# EAGLE board Schema_IOExp_De_Windt_Kyell (EAGLE 9.6.2)
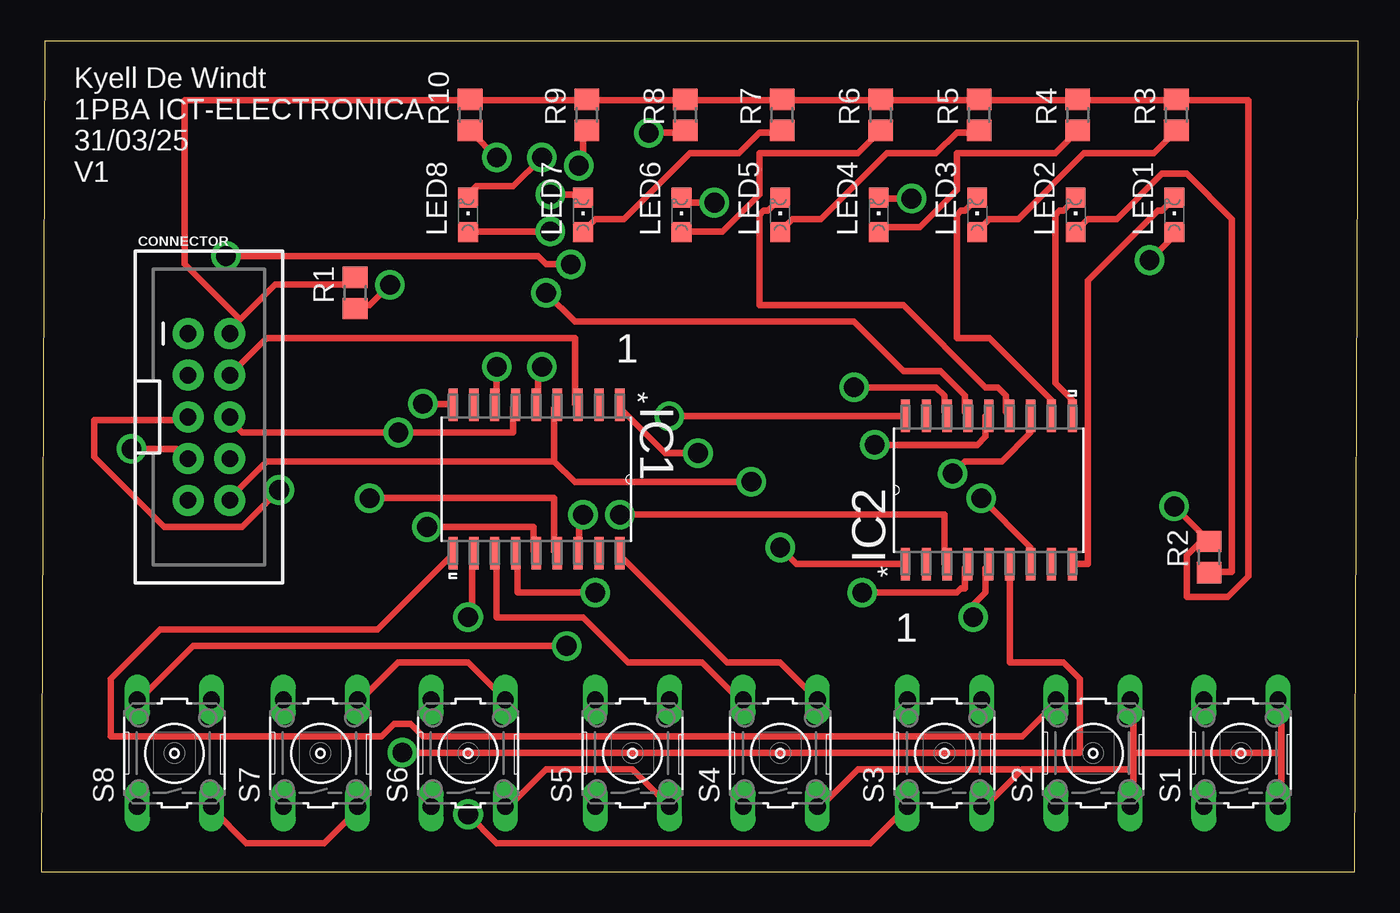
[diagram p0: board, top side]
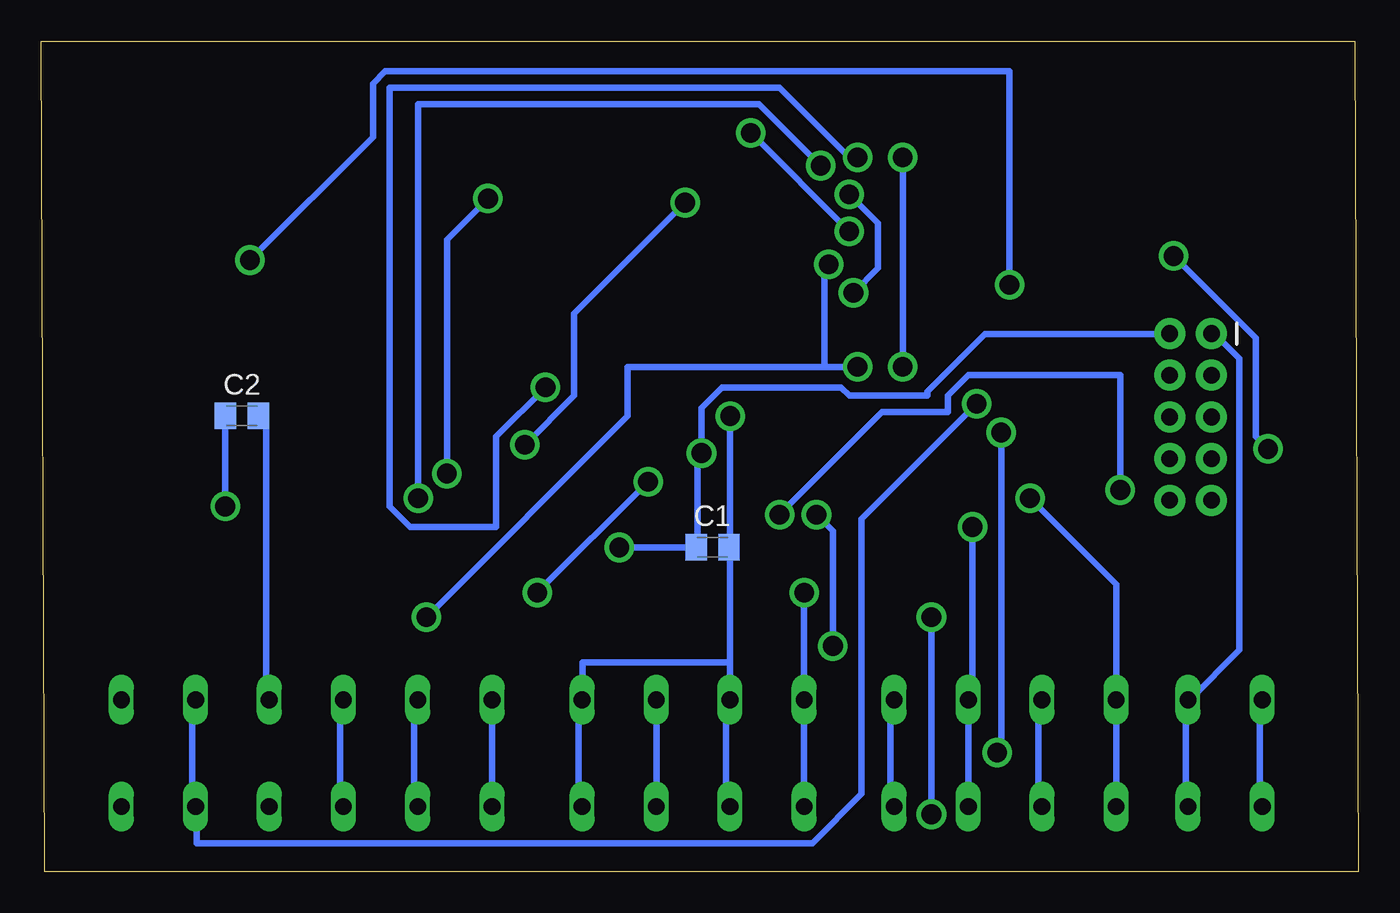
[diagram p1: board, bottom side, seen from below]

Size 80.21 x 50.59 mm. Coordinates in mm from the lower left corner, seen from the top.
Outline: 0,0 80,0 80.21,50.59 0.21,50.59 0,0
Copper layers (1*16): Top 0.035mm / dielectric 1.5mm / Bottom 0.035mm
Design rules "default *": minimum track width 0.4mm, minimum drill 1.2mm, track to track 16mil, track to pad 16mil, pad to pad 16mil, via to via 16mil, smd to smd 16mil, copper to edge 40mil, drill to drill 6mil, minimum pad ring 10mil, minimum via ring 8mil, stop-mask expansion 4mil, vias tented up to drill 0mil, thermal gap 10mil

## Footprints (pad centres in the part's own frame; a part is rotated, then mirrored left to right if it is on the bottom)
C0805K = smd 1.3 x 1.6: 1 -1,0; 2 1,0
2X5-SHROUDED = drill 1.016 pad 1.88: 1 -1.27,5.08; 2 1.27,5.08; 3 -1.27,2.54; 4 1.27,2.54; 5 -1.27,0; 6 1.27,0; 7 -1.27,-2.54; 8 1.27,-2.54; 9 -1.27,-5.08; 10 1.27,-5.08
SOIC127P1030X265-18N = smd 1.981 x 0.559: 1 -4.521,5.08; 2 -4.521,3.81; 3 -4.521,2.54; 4 -4.521,1.27; 5 -4.521,0; 6 -4.521,-1.27; 7 -4.521,-2.54; 8 -4.521,-3.81; 9 -4.521,-5.08; 10 4.521,-5.08; 11 4.521,-3.81; 12 4.521,-2.54; 13 4.521,-1.27; 14 4.521,0; 15 4.521,1.27; 16 4.521,2.54; 17 4.521,3.81; 18 4.521,5.08
CHIPLED_0805 = smd 1.2 x 1.2: A 0,-1.05; C 0,1.05
R0805 = smd 1.3 x 1.5: 1 -0.95,0; 2 0.95,0
B3F-10XX = drill 1.016 long: 1 -3.251,2.261; 2 3.251,2.261; 3 -3.251,-2.261; 4 3.251,-2.261

## Placement (x,y rotation side)
C1  100nF  [C0805K]  39.33,19.77 0 bottom
C2  100nF  [C0805K]  67.98,27.77 0 bottom
CONNECTOR  SV1  [2X5-SHROUDED]  10.22,27.7 0 top
IC1  MCP23S09-E/SO  [SOIC127P1030X265-18N]  30.16,23.91 270 top
IC2  MCP23S09-E/SO  [SOIC127P1030X265-18N]  57.71,23.25 90 top
LED1  groen  [CHIPLED_0805]  69,40 0 top
LED2  groen  [CHIPLED_0805]  63,40 0 top
LED3  groen  [CHIPLED_0805]  57,40 0 top
LED4  groen  [CHIPLED_0805]  51,40 0 top
LED5  geel  [CHIPLED_0805]  45,40 0 top
LED6  geel  [CHIPLED_0805]  39,40 0 top
LED7  rood  [CHIPLED_0805]  33,40 0 top
LED8  rood  [CHIPLED_0805]  26,40 0 top
R1  10K  [R0805]  19.12,35.25 90 top
R2  10K  [R0805]  71.12,19.17 90 top
R3  100  [R0805]  69.12,46.09 90 top
R4  100  [R0805]  63.12,46.09 90 top
R5  100  [R0805]  57.12,46.09 90 top
R6  100  [R0805]  51.12,46.09 90 top
R7  100  [R0805]  45.12,46.09 90 top
R8  100  [R0805]  39.23,46.09 90 top
R9  68  [R0805]  33.23,46.09 90 top
R10  68  [R0805]  26.12,46.09 90 top
S1  [B3F-10XX]  73.06,7.22 90 top
S2  [B3F-10XX]  64.06,7.22 90 top
S3  [B3F-10XX]  55.01,7.22 90 top
S4  [B3F-10XX]  45.01,7.22 90 top
S5  [B3F-10XX]  36.01,7.22 90 top
S6  [B3F-10XX]  26.01,7.22 90 top
S7  [B3F-10XX]  17.01,7.22 90 top
S8  [B3F-10XX]  8.12,7.22 90 top

## Library data of the parts
C1 C2 = Fidget_Spinner; SPICEPREFIX: C
CONNECTOR = SparkFun-Connectors; PROD_ID: CONN-08671; SF_ID: PRT-08506
IC1 IC2 = MCP23S09_E_SO; DESCRIPTION: IC I/O EXPANDER; MPN: McP23S09-E/SO; OC_FARNELL: 1699844; OC_NEWARK: 04R7657; PACKAGE: SOIC-18; SUPPLIER: Microchip
LED1-LED8 = led
R1-R10 = rcl; SPICEPREFIX: R
S1-S8 = switch-omron; MPN: B3F-1000; OC_FARNELL: 176432; OC_NEWARK: 36M3542

## Nets
CH1: CONNECTOR.4 IC1.3
CH2: CONNECTOR.5 IC2.3
DRUKKNOP1: IC1.9 S1.1 S1.2
DRUKKNOP2: IC1.10 S2.1 S2.2
DRUKKNOP3: IC1.11 S3.1 S3.2
DRUKKNOP4: IC1.12 S4.1 S4.2
DRUKKNOP5: IC1.13 S5.1 S5.2
DRUKKNOP6: IC1.14 S6.1 S6.2
DRUKKNOP7: IC1.15 S7.1 S7.2
DRUKKNOP8: IC1.16 S8.1 S8.2
GND: C1.2 C2.2 CONNECTOR.1 IC1.18 IC2.18 S1.3 S1.4 S2.3 S2.4 S3.3 S3.4 S4.3 S4.4 S5.3 S5.4 S6.3 S6.4 S7.3 S7.4 S8.3 S8.4
LED1: IC2.9 LED1.C
LED2: IC2.10 LED2.C
LED3: IC2.11 LED3.C
LED4: IC2.12 LED4.C
LED5: IC2.13 LED5.C
LED6: IC2.14 LED6.C
LED7: IC2.15 LED7.C
LED8: IC2.16 LED8.C
MISO: CONNECTOR.6 IC1.6 IC2.6
MOSI: CONNECTOR.7 IC1.5 IC2.5
N$3: LED8.A R8.1
N$4: LED7.A R7.1
N$5: LED6.A R6.1
N$6: LED5.A R5.1
N$7: LED4.A R4.1
N$8: LED3.A R3.1
N$9: LED2.A R2.1
N$10: LED1.A R1.1
N$12: IC2.7 R9.1
N$13: IC1.7 R10.1
SCK: CONNECTOR.10 IC1.4 IC2.4
VDD: C1.1 C2.1 CONNECTOR.2 IC1.1 IC2.1 R1.2 R2.2 R3.2 R4.2 R5.2 R6.2 R7.2 R8.2 R9.2 R10.2

## Tracks (layer width: path | path; a pad name or v marks a point on that pad's centre or on a via)
CH1
  Top 0.4: CONNECTOR.4 13.75,32.5 32.5,32.5 32.5,28.5 IC1.3
CH2  (via drill 1.2)
  Top 0.4: v35.25,21.75 55,21.75 55,18.75 IC2.3 | v14.5,23.25 12.25,21 7.5,21 3.25,25.25 3.25,27.5 8.75,27.5 CONNECTOR.5
  Bottom 0.4: v35.25,21.75 29,28 25,28 25,29 23.75,30.25 14.5,30.25 v14.5,23.25
DRUKKNOP1  (via drill 1.2)
  Top 0.4: v23.25,28.5 25,28.5 IC1.9
  Bottom 0.4: v23.25,28.5 30.25,21.5 30.25,4.75 33.25,1.75 70.75,1.75 70.75,3.75 S1.1 71,4 71,10.25 S1.2
DRUKKNOP2
  Top 0.4: IC1.10 25,19.25 20.5,14.75 7.25,14.75 4.25,11.75 4.25,8.25 20.75,8.25 21.5,9 22.5,9 23.25,8.25 59.75,8.25 61.75,10.25 S2.2
  Bottom 0.4: S2.1 62,4 62,10.25 S2.2
DRUKKNOP3  (via drill 1.2)
  Top 0.4: v26,15.5 26.25,15.5 26.25,19.25 IC1.11 | v26,3.5 27.75,1.75 50.5,1.75 52.5,3.75 S3.1
  Bottom 0.4: v26,3.5 v26,15.5 | S3.2 52.75,10.25 52.75,4 S3.1
DRUKKNOP4
  Top 0.4: IC1.12 27.75,19.25 27.75,15.5 33,15.5 35.75,12.75 40.25,12.75 42.5,10.5 S4.2
  Bottom 0.4: S4.1 42.75,4 42.75,10.25 S4.2
DRUKKNOP5  (via drill 1.2)
  Top 0.4: v33.75,17 29,17 29,19.25 IC1.13
  Bottom 0.4: v33.75,17 33.75,10.5 S5.2 33.75,10.25 33.75,4 S5.1
DRUKKNOP6  (via drill 1.2)
  Top 0.4: v23.5,21 30,21 30,19.5 IC1.14
  Bottom 0.4: v23.5,21 23.5,10.5 S6.2 23.75,10.25 23.75,4 S6.1
DRUKKNOP7  (via drill 1.2)
  Top 0.4: v20,22.75 31.25,22.75 31.25,19.5 IC1.15
  Bottom 0.4: v20,22.75 14.75,17.5 14.75,10.5 S7.2 14.75,10.25 14.75,4 S7.1
DRUKKNOP8  (via drill 1.2)
  Top 0.4: v33,21.75 32.75,21.75 32.75,19.5 IC1.16 | v32,13.75 9.25,13.75 6,10.5 S8.2
  Bottom 0.4: v33,21.75 32,20.75 v32,13.75 | S8.1 6,4 6,10.25 S8.2
GND  (via drill 1.2)
  Top 0.4: S7.3 19.25,3.75 17.25,1.75 12.5,1.75 10.5,3.75 S8.3 | S6.4 28.25,10.5 26,12.75 21.75,12.75 19.5,10.5 S7.4 | v38.25,27.75 52.5,27.75 IC2.18 | IC1.18 35.25,19.25 41.75,12.75 45,12.75 47.25,10.5 S4.4 | 75.5,7.25 75.5,10.25 S1.4 | 75.5,7.25 75.5,4 S1.3 | 66.5,7.25 66.5,10.25 S2.4 | 66.5,7.25 66.5,6.25 | 66.5,6.25 66.5,4 S2.3 | 59.62,6.12 59.75,6.25 66.5,6.25 | 59.62,6.12 57.5,4 S3.3 | 66.5,7.25 75.5,7.25 | S4.3 47.5,4 49.75,6.25 59.5,6.25 59.62,6.12 | S6.3 28.5,4 30.75,6.25 36,6.25 38.25,4 S5.3
  Bottom 0.4: S6.3 28.5,4 28.5,10.25 S6.4 | S7.3 19.5,4 19.5,10.25 S7.4 | S8.3 10.5,4 10.5,10.25 S8.4 10.25,10.5 7.25,13.5 7.25,31.25 8.75,32.75 CONNECTOR.1 | 38.25,12.75 38.25,10.5 S5.4 38.5,10.25 38.5,4 S5.3 | 38.25,12.75 38.25,19.75 C1.2 38.25,20 v38.25,27.75 | S4.3 47.5,4 47.5,10.25 S4.4 47.25,10.5 47.25,12.75 38.25,12.75 | S3.3 57.5,4 57.5,10.25 S3.4 | C2.2 66.75,27.75 66.5,27.5 66.5,10.5 S2.4
LED1
  Top 0.4: LED1.C 69,41 68.25,40.25 68,40.25 63.75,36 63.75,18.75 63,18.75 IC2.9
LED2
  Top 0.4: LED2.C 63,41 62.25,40.25 62,40.25 61.75,40 61.75,29.75 62.75,28.75 62.75,28 IC2.10
LED3
  Top 0.4: LED3.C 57,41 56.25,40.25 56,40.25 55.75,40 55.75,32.5 57.75,32.5 61.5,28.75 61.5,28 IC2.11
LED4  (via drill 1.2)
  Top 0.4: v53,41 51,41 LED4.C | v55.5,24.25 56.25,25 58.5,25 60.25,26.75 IC2.12
  Bottom 0.4: v53,41 55.5,38.5 v55.5,24.25
LED5
  Top 0.4: LED5.C 45,41 44.25,40.25 44,40.25 43.75,40 43.75,34.5 52.5,34.5 57.5,29.5 58.25,29.5 58.75,29 58.75,28 IC2.13
LED6  (via drill 1.2)
  Top 0.4: v41,40.75 39.25,40.75 39,41 LED6.C | v50.75,26 57,26 57.5,26.5 57.5,27.75 IC2.14
  Bottom 0.4: v41,40.75 47.75,34 47.75,29 v50.75,26
LED7  (via drill 1.2)
  Top 0.4: v31,41.25 33,41.25 LED7.C | v30.75,35.25 32.5,33.5 49.5,33.5 52.5,30.5 54.75,30.5 56.25,29 56.25,28 IC2.15
  Bottom 0.4: v31,41.25 29.25,39.5 29.25,36.75 v30.75,35.25
LED8  (via drill 1.2)
  Top 0.4: v30.5,43.5 28.75,41.75 26.5,41.75 26,41.25 LED8.C | v49.5,29.5 54.5,29.5 55,29 55,28 IC2.16
  Bottom 0.4: v30.5,43.5 31,43.5 35.25,47.75 59,47.75 59,22.25 57.75,21 52.5,21 52.5,26.5 v49.5,29.5
MISO  (via drill 1.2)
  Top 0.4: IC1.6 28.75,28.25 28.75,26.75 v21.75,26.75 12.25,26.75 11.5,27.5 CONNECTOR.6 | v22,7.25 63.25,7.25 63.25,11.75 62.25,12.75 59,12.75 59,18.5 IC2.6
  Bottom 0.4: v22,7.25 21.75,7.5 v21.75,26.75
MOSI  (via drill 1.2)
  Top 0.4: v30.5,30.75 30.25,30.75 30.25,28.5 IC1.5 | v56.75,15.5 56.75,16.25 57.5,17 57.5,18.5 IC2.5 | v5.5,25.75 8.25,25.75 8.75,25.25 CONNECTOR.7 | v11.25,37.5 30.25,37.5 30.75,37 v32.25,37
  Bottom 0.4: 32.5,30.75 44.5,30.75 44.5,27.75 v56.75,15.5 | 32.5,30.75 v30.5,30.75 | v5.5,25.75 6.25,26.5 6.25,32.5 v11.25,37.5 | v32.25,37 32.5,36.75 32.5,30.75
N$3  (via drill 1.2)
  Top 0.4: v31,39 26,39 LED8.A | v37,45 39,45 R8.1
  Bottom 0.4: v37,45 v31,39
N$4
  Top 0.4: LED7.A 33,39 33.75,39.75 35.5,39.75 39.5,43.75 42.5,43.75 43.75,45 45,45 R7.1
N$5
  Top 0.4: LED6.A 39,39 41.5,39 43.75,41.25 43.75,43.75 49.75,43.75 51,45 R6.1
N$6
  Top 0.4: LED5.A 45,39 45.75,39.75 47.5,39.75 51.5,43.75 54.5,43.75 55.75,45 57,45 R5.1
N$7
  Top 0.4: LED4.A 51,39 51.25,39.25 53.5,39.25 55.75,41.5 55.75,43.75 61.75,43.75 63,45 R4.1
N$8
  Top 0.4: LED3.A 57,39 57.75,39.75 59.5,39.75 63.5,43.75 67.75,43.75 69,45 R3.1
N$9
  Top 0.4: LED2.A 63,39 63.75,39.75 65.5,39.75 68.25,42.5 69.75,42.5 72.5,39.75 72.5,18.25 71.25,18.25 R2.1
N$10  (via drill 1.2)
  Top 0.4: v67.5,37.25 69,38.75 LED1.A | v21.25,35.75 20,34.5 19.25,34.5 R1.1
  Bottom 0.4: v67.5,37.25 60,44.75 60,48 59.25,48.75 21.25,48.75 v21.25,35.75
N$12  (via drill 1.2)
  Top 0.4: v32.75,43 33,43 33,45 R9.1 | v57.25,22.75 60.25,19.75 IC2.7
  Bottom 0.4: v32.75,43 36.5,46.75 57.25,46.75 v57.25,22.75
N$13  (via drill 1.2)
  Top 0.4: v27.75,43.5 26.25,45 R10.1 | v27.75,30.75 27.75,28.5 IC1.7
  Bottom 0.4: v27.75,30.75 v27.75,43.5
SCK  (via drill 1.2)
  Top 0.4: 31.25,25 31.25,28.25 IC1.4 | 31.25,25 13.75,25 11.5,22.75 CONNECTOR.10 | v50,17 55.75,17 56,17.25 56.25,17.25 56.25,18.5 IC2.4 | v43.25,23.75 32.5,23.75 31.25,25
  Bottom 0.4: v43.25,23.75 v50,17
VDD  (via drill 1.2)
  Top 0.4: v45,19.75 46,18.75 52.5,18.75 IC2.1 | v40,25.5 38,25.5 35.25,28.25 IC1.1 | 12.12,33.62 11.5,33 CONNECTOR.2 | 12.12,33.62 14.25,35.75 18.75,35.75 19,36 R1.2 | v69,22.25 71,20.25 R2.2 70.75,20.25 69.75,19.25 69.75,16.75 72.25,16.75 73.5,18 73.5,47 69.25,47 R3.2 69,47 63.25,47 R4.2 63,47 57.25,47 R5.2 57,47 51.25,47 R6.2 51,47 45.25,47 R7.2 45,47 39.25,47 R8.2 39,47 33.25,47 R9.2 33,47 26.25,47 R10.2 26,47 8.75,47 8.75,37 12.12,33.62
  Bottom 0.4: v45,19.75 40.5,19.75 C1.1 40.25,20 40.25,25.25 v40,25.5 40,28.25 38.75,29.5 31.5,29.5 31,29 26.25,29 26.25,29.25 22.75,32.75 11.5,32.75 CONNECTOR.2 | v69,22.25 69,27.75 C2.1

## Text on the board
tNames: Kyell De Windt / 1PBA ICT-ELECTRONICA / 31/03/25 / V1 | 1 | 1